# Altium PCB cs301_Group11_4_holes.PcbDoc
Units mm, origin at the board's own origin, x right, y up, seen from the top; angles counter-clockwise.
Board outline 87.88 x 127 mm, 2 copper layers (Top Layer, Bottom Layer); 87 components, 60 nets, 284 pads, 20 vias.
Unrouted connection lines stored in the file: 1.
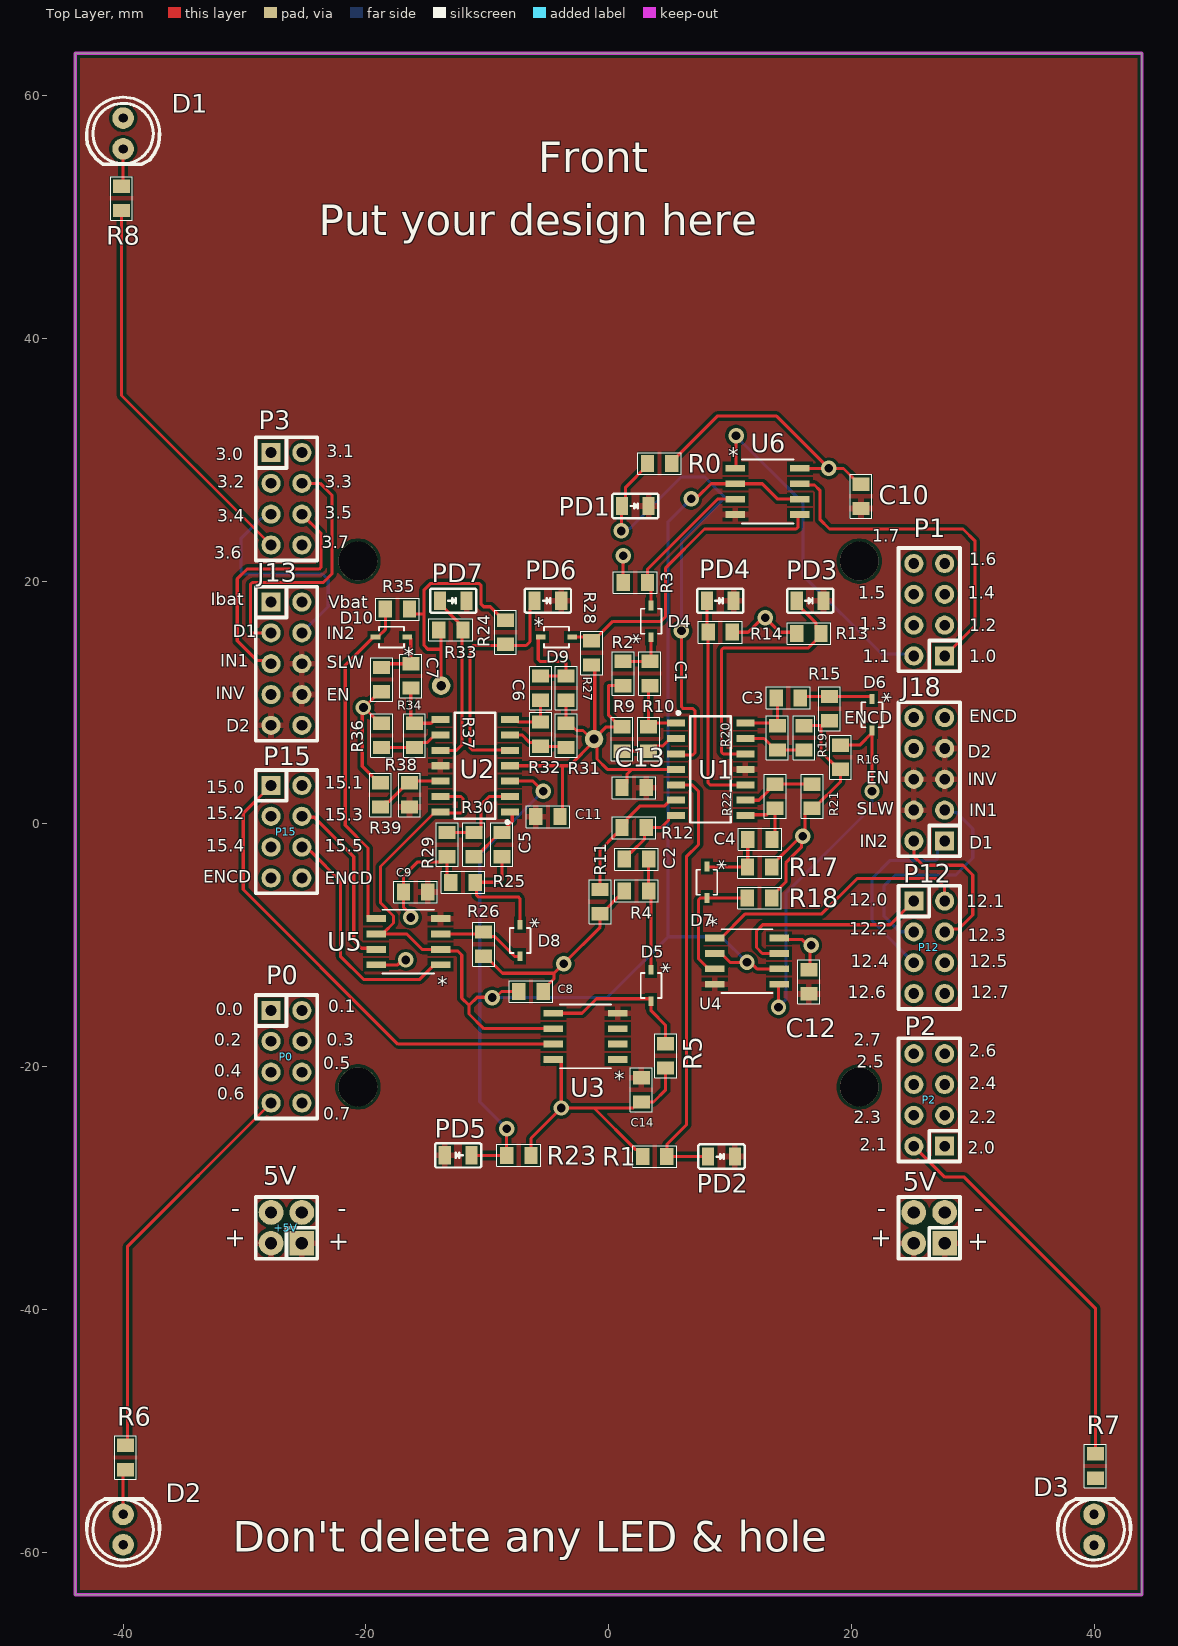
[diagram p0: Top Layer view]
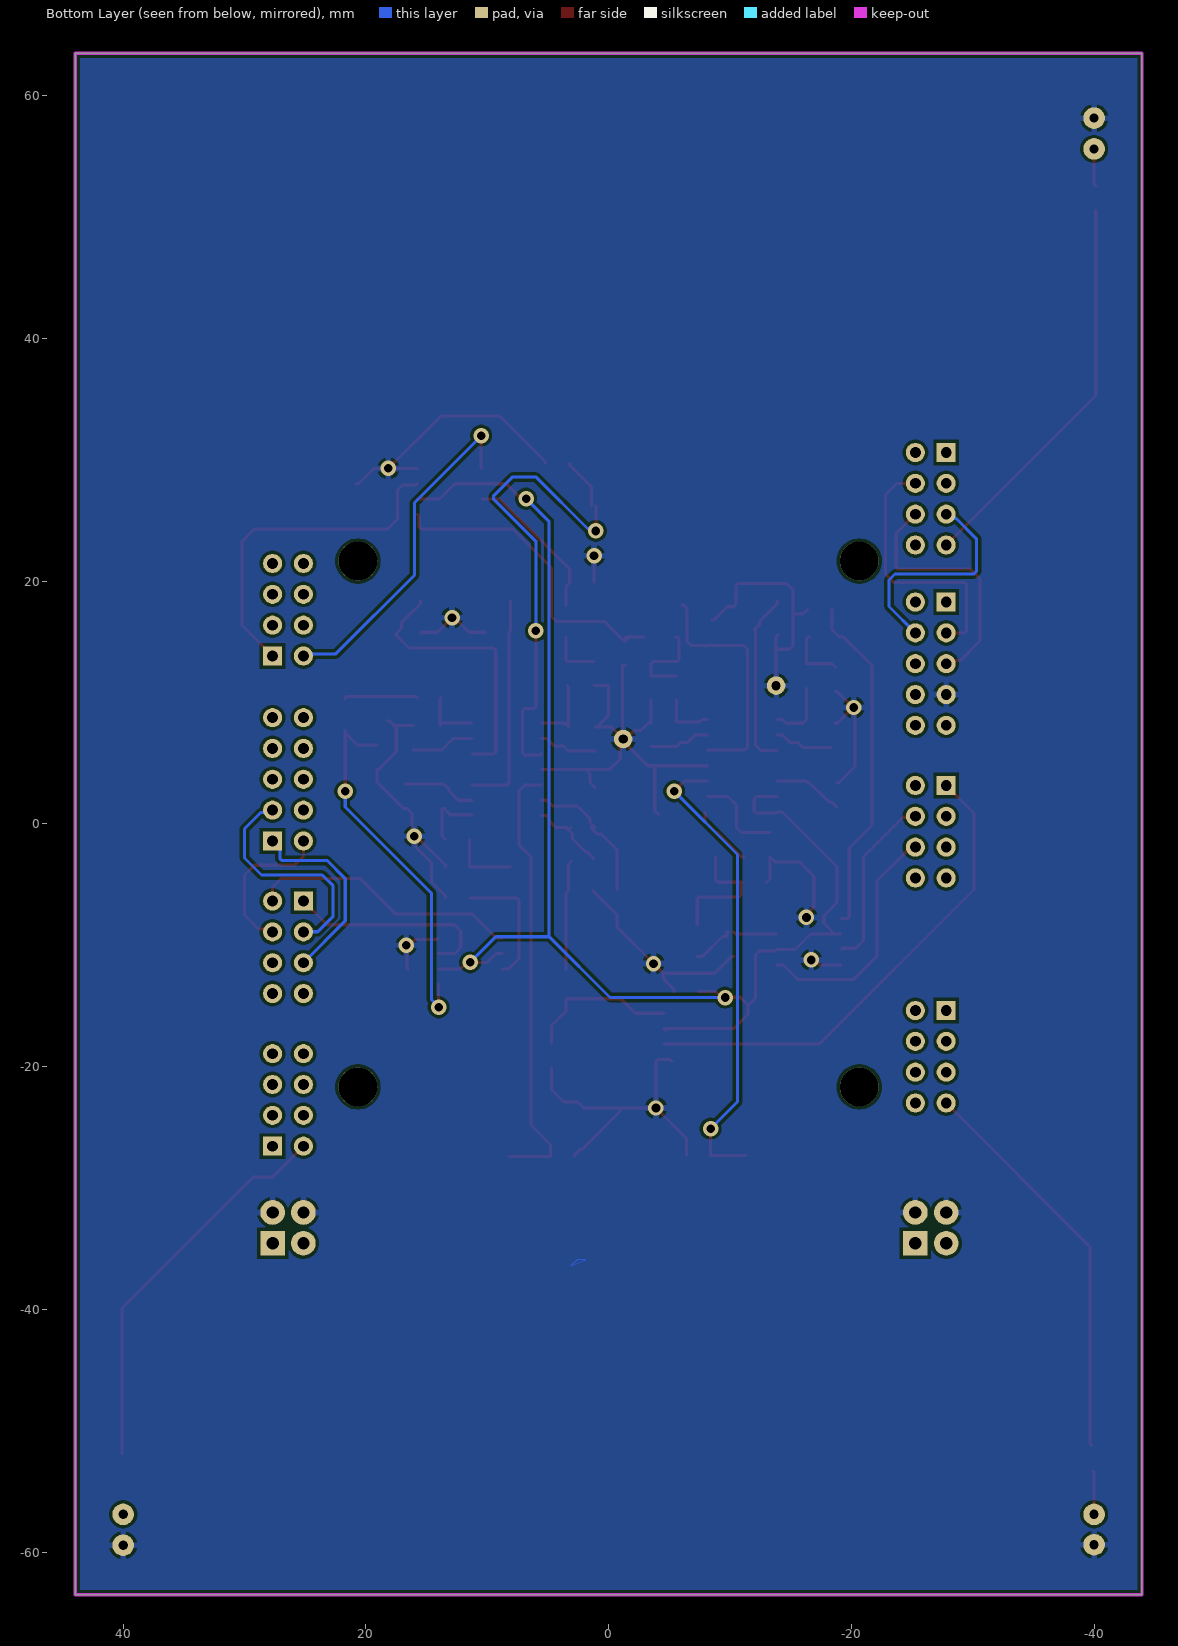
[diagram p1: Bottom Layer view, seen from below]

## Layer stack, top to bottom
Top Solder: solder mask 0.0102, Solder Resist, Dk 3.5
Top Layer: signal copper 0.0356
Dielectric1: dielectric 0.32, FR-4, Dk 4.8
Bottom Layer: signal copper 0.0356
Bottom Solder: solder mask 0.0102, Solder Resist, Dk 3.5

## Board outline
-43.942,-63.5 -43.942,63.5 43.942,63.5 43.942,-63.5

## Design rules (kind name [scope] priority, off if disabled: settings)
Clearance [All] p1: gap=0.254 ignorepadtopadclearanceinfootprint=FALSE except(0: Arc-Hole Track-Hole SMDPad-Hole THPad-Hole Via-Hole Fill-Hole Poly-Hole Region-Hole Text-Hole)
PolygonConnect [All] p1: connectstyle=Relief reliefconductorwidth=0.508 reliefentries=4 polygonreliefangle="90 Angle" airgapwidth=0.254
RoutingVias [All] p1: holewidth=0.711 width=1.27 viastyle="Through Hole" minholewidth=0.711 minwidth=1.27 maxholewidth=0.711 maxwidth=1.27
SilkToSolderMaskClearance SilkscreenOverComponentPads [IsPad] p1: minsilkscreentomaskgap=0.254 clearancetoexposedcopper=TRUE
SolderMaskExpansion [All] p1: expansion=0.102 istentingtop=FALSE
Width [All] p1: maxlimit=0.762 minlimit=0.254 preferedwidth=0.254 minimp=50.000000 maximp=50.000000 favimp=50.000000
29 further rules are at their usual default settings.

## Classes and differential pairs
component class Sensors: C1 C2 C3 C4 C5 C6 C7 D4 D5 D6 D7 D8 D9 D10 PD1 PD2 PD3 PD4 PD5 PD6 PD7 R0 R1 R2 R3 R4 R5 R9 R10 R11 R12 R13 R14 R15 R16 R17 R18 R19 R20 R21 R22 R23 R24 R25 R26 R27 R28 R29 R30 R31 R32 R33 R34 R35 R36 R37 U1 U2 U3 U4 U5 U6

## Components (designator, comment, footprint, x,y, rotation, side; value= is the part's Value field where it differs from the comment)
5V "5V" IDC4 27.686,-34.544 r90 top locked
+5V "5V" IDC4 -25.273,-34.544 r90 top locked
C1 "*" "0805 CAP" 3.4,12.4 r90 top
C2 "*" "0805 CAP" 2.3,-2.9 r0 top
C3 "*" "0805 CAP" 14.8,10.4 r0 top
C4 "*" "0805 CAP" 12.462,-1.27 r180 top
C5 "*" "0805 CAP" -8.8,-1.7 r270 top
C6 "*" "0805 CAP" -5.6,11.2 r90 top
C7 "*" "0805 CAP" -16.3,12.2 r90 top
C8 "*" "0805 CAP" -6.4,-13.8 r0 top
C9 "*" "0805 CAP" -15.9,-5.6 r0 top
C10 "*" "0805 CAP" 20.8,27 r90 top
C11 "*" "0805 CAP" -5,0.6 r0 top
C12 "*" "0805 CAP" 16.5,-13 r90 top
C13 "*" "0805 CAP" 2.1,3 r180 top
C14 "*" "0805 CAP" 2.7,-21.9 r270 top
D1 "LED" LED0.1/5MM#1 -40,55.62 r180 top locked
D2 "LED" LED0.1/5MM#2 -40,-56.88 r0 top locked
D3 "LED" LED0.1/5MM#1 40,-56.88 r0 top locked
D4 "BAT54JFILM" CR_SOD323_BAT54_STM 3.5,16.7 r90 top
D5 "BAT54JFILM" CR_SOD323_BAT54_STM 3.5,-13.3 r270 top
D6 "BAT54JFILM" CR_SOD323_BAT54_STM 21.7,8.998 r270 top
D7 "BAT54JFILM" CR_SOD323_BAT54_STM 8.1,-4.8 r270 top
D8 "BAT54JFILM" CR_SOD323_BAT54_STM -7.3,-9.6 r270 top
D9 "BAT54JFILM" CR_SOD323_BAT54_STM -4.3,15.4 r0 top
D10 "BAT54JFILM" CR_SOD323_BAT54_STM -17.9,15.4 r180 top
J13 "CON10" IDC10 -27.813,18.288 r270 top locked
J18 "CON10" IDC10 27.686,-1.397 r90 top locked
P0 "P0" idc8 -27.813,-15.367 r270 top locked
P1 "P1" idc8 27.686,13.843 r90 top locked
P2 "P2" idc8 27.686,-26.543 r90 top locked
P3 "P3" idc8 -27.813,30.607 r270 top locked
P12 "P12" idc8 25.146,-6.35 r270 top locked
P15 "P15" IDC8 -27.813,3.175 r270 top locked
PD1 "SD019" SD019 2.2,26.2 r0 top
PD2 "SD019" SD019 9.3,-27.4 r0 top
PD3 "SD019" SD019 16.6,18.4 r0 top
PD4 "SD019" SD019 9.2,18.4 r0 top
PD5 "SD019" SD019 -12.4,-27.3 r180 top
PD6 "SD019" SD019 -5,18.4 r0 top
PD7 "SD019" SD019 -12.8,18.4 r0 top
R0 "*" "0805 RES" 4.2,29.7 r180 top
R1 "*" "0805 RES" 3.8,-27.4 r0 top
R2 "*" "0805 RES" 1.2,12.4 r90 top
R3 "*" "0805 RES" 2.2,19.9 r0 top
R4 "*" "0805 RES" 2.3,-5.5 r0 top
R5 "*" "0805 RES" 4.7,-19.1 r90 top
R6 "*" "0805 RES" -39.8,-52.2 r270 top
R7 "*" "0805 RES" 40.1,-52.9 r90 top
R8 "*" "0805 RES" -40.132,51.546 r270 top
R9 "*" "0805 RES" 1.1,7 r90 top
R10 "*" "0805 RES" 3.3,7 r90 top
R11 "*" "0805 RES" -0.7,-6.4 r270 top
R12 "*" "0805 RES" 2.1,-0.3 r0 top
R13 "*" "0805 RES" 16.5,15.7 r0 top
R14 "*" "0805 RES" 9.2,15.8 r180 top
R15 "*" "0805 RES" 18.2,9.5 r90 top
R16 "*" "0805 RES" 19.1,5.5 r90 top
R17 "*" "0805 RES" 12.446,-3.556 r180 top
R18 "*" "0805 RES" 12.43,-6.096 r180 top
R19 "*" "0805 RES" 16.1,7.1 r90 top
R20 "*" "0805 RES" 13.9,7.1 r90 top
R21 "*" "0805 RES" 16.764,2.286 r270 top
R22 "*" "0805 RES" 13.716,2.286 r270 top
R23 "*" "0805 RES" -7.4,-27.3 r180 top
R24 "*" "0805 RES" -8.5,15.8 r270 top
R25 "*" "0805 RES" -12,-4.8 r0 top
R26 "*" "0805 RES" -10.3,-9.9 r90 top
R27 "*" "0805 RES" -3.5,11.2 r90 top
R28 "*" "0805 RES" -1.4,14.1 r90 top
R29 "*" "0805 RES" -13.3,-1.7 r270 top
R30 "*" "0805 RES" -11.1,-1.7 r270 top
R31 "*" "0805 RES" -3.5,7.3 r90 top
R32 "*" "0805 RES" -5.6,7.4 r90 top
R33 "*" "0805 RES" -13,16 r0 top
R34 "*" "0805 RES" -18.7,11.9 r90 top
R35 "*" "0805 RES" -17.4,17.7 r180 top
R36 "*" "0805 RES" -18.7,7.3 r90 top
R37 "*" "0805 RES" -16,7.3 r90 top
R38 "*" "0805 RES" -16.4,2.4 r270 top
R39 "*" "0805 RES" -18.8,2.4 r270 top
U1 "LM324DR2G" SOIC-14 8.4,4.5 r0 top
U2 "LM324DR2G" SOIC-14 -11,4.8 r180 top
U3 "LM393EDR2G" SOIC8_4X5_ONS -1.9,-17.5 r180 top
U4 "LM393EDR2G" SOIC8_4X5_ONS 11.4,-11.3 r0 top
U5 "LM393EDR2G" SOIC8_4X5_ONS -16.5,-9.7 r180 top
U6 "LM393EDR2G" SOIC8_4X5_ONS 13.1,27.4 r0 top

## Footprints (in the part's own frame and the unit in brackets; to place one, negate y for a bottom-side part, rotate by r counter-clockwise, add the part's x,y. Pads: shape width x height; smd on the part's side, far side on the other; paste and mask are expansions set on the pad)
"0805 CAP" [mm] "http://www.digikey.co.nz/Web%20Export/Supplier%20Content/Vishay_8026/PDF/VishayBeyschlag_SolderPad.pdf?redirected=1 with dimension G modified by +0.25mm"
  rect 1.1x1.4 smd: 1(-1,0) 2(1,0)
  silkscreen extent -1.8,-0.9 1.8,0.9, body extent -1.04,-0.66 1.04,0.66, height 0.61
"0805 RES" [mm] "http://www.digikey.co.nz/Web%20Export/Supplier%20Content/Vishay_8026/PDF/VishayBeyschlag_SolderPad.pdf?redirected=1 with dimension G modified by +0.25mm"
  rect 1.1x1.4 smd: 1(-1,0) 2(1,0)
  silkscreen extent -1.8,-0.9 1.8,0.9, body extent -1.04,-0.66 1.04,0.66, height 0.61
CR_SOD323_BAT54_STM [mil]
  rect 31.5x17 smd paste+0 mask+0: 1(-51.25,0) 2(51.25,0)
  silkscreen extent -40,-34 40,34, body extent -53,-29 53,29, height 46
IDC4 [mil]
  rect 80x80 hole 40: 1(0,0)
  round 80 hole 40: 2(0,100) 3(100,0) 4(100,100)
  silkscreen extent -50,-50 150,150
idc8 [mil]
  rect 62x62 hole 35: 1(0,0)
  round 62 hole 35: 2(0,100) 3(100,0) 4(100,100) 5(200,0) 6(200,100) 7(300,0) 8(300,100)
  silkscreen extent -50,-50 350,150
IDC8 [mil]
  rect 62x62 hole 35: 1(0,0)
  round 62 hole 35: 2(0,100) 3(100,0) 4(100,100) 5(200,0) 6(200,100) 7(300,0) 8(300,100)
  silkscreen extent -50,-50 350,150
IDC10 [mil]
  rect 62x62 hole 35: 1(0,0)
  round 62 hole 35: 2(0,100) 3(100,0) 4(100,100) 5(200,0) 6(200,100) 7(300,0) 8(300,100) 9(400,0) 10(400,100)
  silkscreen extent -50,-50 450,150
LED0.1/5MM#1 [mil]
  round 70 hole 30: A(0,0) K(0,-100)
  silkscreen extent -118,-168 118,50
LED0.1/5MM#2 [mil]
  round 70 hole 30: A(0,0) K(0,-98.43)
  silkscreen extent -118,-168 118,50
SD019 [mm]
  rect 1x1.5 smd: 1(-1.1,0) 2(1.1,0)
  silkscreen extent -1.9,-1 1.9,1, body extent -1,-0.63 1,0.63, height 1.1
SOIC8_4X5_ONS [mil]
  rect 63x22 smd paste+0 mask+0: 1(-104.5,75) 2(-104.5,25) 3(-104.5,-25) 4(-104.5,-75) 5(104.5,-75) 6(104.5,-25) 7(104.5,25) 8(104.5,75)
  silkscreen extent -84,-104 84,104, body extent -122,-99 122,99, height 69
SOIC-14 [mm] "SOIC, 14-Leads, Body 8.75x4mm, Pitch 1.27mm"
  rect 1.48x0.58 smd: 1(-2.86,3.81) 2(-2.86,2.54) 3(-2.86,1.27) 4(-2.86,0) 5(-2.86,-1.27) 6(-2.86,-2.54) 7(-2.86,-3.81) 8(2.86,-3.81) 9(2.86,-2.54) 10(2.86,-1.27) 11(2.86,0) 12(2.86,1.27) 13(2.86,2.54) 14(2.86,3.81)
  silkscreen extent -2.78,-4.38 1.67,4.77, body extent -3.1,-4.38 3.1,4.37, height 1.75

## Part data
5V +5V: library part CON4, "Connector"
C1 C2 C3 C4 C5 C6 C7 C8 C9 C10 C11 C12 C13 C14: library part CerCap_SMT_0805, "SMT ceramic capacitor 0805 size"
D4 D5 D6 D7 D8 D9 D10: "No Description Available", Mfr_Name=STMicroelectronics
J13 J18: "Connector"
P0 P1 P2 P3: library part CON8, "Connector"
P12 P15: library part CON8_1, "Connector"
R0 R1 R2 R3 R4 R5 R6 R7 R8 R9 R10 R11 R12 R13 R14 R15 R16 R17 R18 R19 R20 R21 R22 R23 R24 R25 R26 R27 R28 R29 R30 R31 R32 R33 R34 R35 R36 R37 R38 R39: library part Res_SMT_0805, "0805 resistor", ComponentLink1Description=https://nz.mouser.com/datasheet/2/315/AOA0000C304-1149620.pdf, LatestRevisionDate=17-Jul-2002, LatestRevisionNote="Re-released for DXP Platform.", PackageReference=AXIAL-0.4, Published=8-Jun-2000, Publisher="Altium Limited"
U1 U2: library part LM324DR_SMT_SOIC16, "Single Supply Quad Operational Amplifier, 3 to 32 V, 0 to 70 degC, 14-Pin SOIC, Pb-Free, Tape and Reel", Manufacturer="On Semiconductor", ComponentLink1Description="Manufacturer URL", ComponentLink1URL=http://www.onsemi.com/, ComponentLink2Description=Datasheet, ComponentLink2URL=http://www.onsemi.cn/pub_link/Collateral/LM324-D.PDF, ComponentLink3Description="Package Specification", ComponentLink3URL=http://www.onsemi.com/pub_link/Collateral/751A-03.PDF, DatasheetVersion="Rev. 25", Mounting Technology="Surface Mount", PackageDescription="14-Pin Small Outline Integrated Circuit, Body 8.65 x 3.9 mm, Pitch 1.27 mm", PackageReference=SOIC-14-751A-03, PackageVersion="Rev. K, 05/2011", Packing="Tape and Reel", PartNumber=LM324DR2G, RoHS=TRUE, VCC Max (V)=32, VCC Min (V)=3

## Free pads (board coordinates)
  round 3.2 hole 3.2 unplated: 1(-20.65,-21.666) 1(-20.65,21.666) 1(20.65,-21.666) 1(20.65,21.666)
  round 1.524 hole 0.762: 2(-1.2,7) 3(-13.8,11.4)

## Via types
v1: diameter 1.27, hole 0.711, Top Layer to Bottom Layer, 20 vias

## Nets (pads, with @x,y where several pads share a name; then routed paths per layer and width w, separated by ;. In a path a pad name is that pad's centre, name@x,y a point inside that pad or via, vN(x,y) a via of type N, cw(c..) or ccw(c..) an arc to the next point about the centre after c; other vN are vias at no path point)
1.0: P1.1 U6.7 | length 28.3
  Top Layer w0.254: U6.7 15.854,27.935 16.965,27.935 17.4,27.5 17.4,25.1 18.2,24.3 29.2,24.3 30.195,23.305 30.195,16.352 P1.1
1.1: P1.2 U6.1 | length 28.4
  Top Layer w0.254: U6.1 10.5,29.359 v1(10.5,32)
  Bottom Layer w0.254: v1@10.446,32.011 16,26.457 16,20.5 22.479,14.021 24.968,14.021 P1.2
12.0: P12.1 U4.7 | length 17.4
  Top Layer w0.254: U4.7 12.665,-10.665 12.18,-10.18 12.18,-8.82 12.7,-8.3 23.196,-8.3 P12.1
12.1: P12.2 U4.1 | length 22.4
  Top Layer w0.254: U4.1 9.266,-9.395 11.261,-7.4 17.567,-7.4 20.467,-4.5 27,-4.5 27.686,-5.186 P12.2
15.0: P15.1 U3.7 | length 40.3
  Top Layer w0.254: P15.1 -30.1,0.888 -30.1,-5.4 -17.365,-18.135 U3.7
15.3: P15.4 U5.7 | length 14.7
  Top Layer w0.254: P15.4 -25.191,0.553 -24.253,0.553 -21,-2.7 -21,-9.6 -20.365,-10.235 -19.254,-10.235 U5.7
15.5: P15.6 U5.1 | length 20.1
  Top Layer w0.254: P15.6 -24.916,-1.905 -24.532,-2.288 -24.512,-2.288 -22.1,-4.7 -22.1,-10.9 -20.2,-12.8 -15.561,-12.8 -14.366,-11.605 U5.1
+5V: 5V.1 5V.2 +5V.1 +5V.2 C9.2 C10.1 C11.1 C12.1 C13.1 C14.1 J13.6 J13.8 J13.9 J18.4 J18.5 J18.6 J18.7 PD1.2 PD2.2 PD3.2 PD4.2 PD5.2 PD6.2 PD7.2 R38.2 U1.11 U2.11 U3.4 U4.4 U5.4 U6.4
GND: 5V.3 5V.4 +5V.3 +5V.4 C8.2 C9.1 C10.2 C11.2 C12.2 C13.2 C14.2 D1.K D2.K D3.K J13.7 pad.2 pad.3 R0.1 R1.1 R2.1 R3.1 R4.1 R5.1 R9.2 R11.2 R13.1 R14.1 R15.1 R16.1 R17.1 R18.1 R19.2 R21.2 R23.1 R24.1 R25.1 R26.1 R27.1 R28.1 R29.2 R31.2 R33.1 R34.1 R35.1 R36.2 R39.1 U1.4 U2.4 U3.8 U4.8 U5.8 U6.8 | length 190.4
  Top Layer w0.254: U5.8 -17.38,-11.605 -16.975,-11.2 v1(-16.7,-11.2) ; R39.1 -18.95,3.4 -20.3,4.75 -20.3,9.5 v1(-20.2,9.6) v1@-20.15,9.6 ; R36.2 -18.85,8.3 v1@-20.15,9.6 ; R34.1 -18.85,10.9 v1@-20.15,9.6 ; R35.1 -16,17.3 -15.2,17.3 ; v1(-16.3,-7.7) -16.3,-7.463 -16.9,-6.863 C9.1 -16.9,-4.3 -15.723,-3.123 -13.723,-3.123 R29.2 -13.3,-4.5 R25.1 ; R33.1@-14,15.6 -13.973,15.6 -13.8,15.427 -13.8,14.251 ; pad.3 -13.8,14.251 ; R26.1 -10.15,-10.9 -8.75,-12.3 -4.5,-12.3 ; R24.1 -8.65,16.8 -9.75,17.9 -10.3,17.9 -10.5,18.1 -10.5,19.651 -10.649,19.8 -14.7,19.8 -15.2,19.3 -15.2,17.3 ; U2.4 -3.8,4.8 ; R23.1 -6.4,-25.9 v1(-3.9,-23.4) ; C8.2 -5.4,-13.65 -4.504,-12.754 -4.504,-12.304 -4.5,-12.3 ; U3.8@-5.227,-19.557 -5.075,-19.405 U3.8 -4.052,-19.405 -3.9,-19.557 v1(-3.9,-23.4) ; C11.2@-4.092,0.8 -3.8,1.092 -3.8,4.8 ; R31.2 R27.1 ; R31.2@-3.35,8.4 -2.65,7.7 -2.116,7.7 -1.416,7 pad.2 ; R28.1 -1.1,13.1 -1.142,13.058 pad.2@-1.142,7.058 ; R11.2 -0.7,-8.5 ; C13.2 1.523,3.423 1.523,4.123 1.9,4.5 ; R9.2 R9.2@0.95,8 ; R2.1 0,11.4 0,8.95 R9.2@0.95,8 ; R3.1 v1(1.2,22.1) ; R4.1 -0.7,-7.5 -0.7,-8.5 ; R1.1 2.8,-27.25 2.377,-26.827 2.227,-26.827 -1.2,-23.4 ; R5.1 4.7,-21.9 3.7,-22.9 2.55,-22.9 2.05,-23.4 -1.2,-23.4 ; R0.1 5.2,29.85 8.95,33.6 13.842,33.6 v1@18.142,29.301 ; U1.4 1.9,4.5 ; R14.1 11.5,15.8 12.7,17 v1(12.9,17) 14.1,15.8 15.4,15.8 R13.1 ; R18.1 13.43,-5.946 14.6,-4.776 14.6,-3.2 15.883,-1.917 15.883,-1.117 v1(16,-1) ; R17.1 13.446,-3.406 15.852,-1 v1(16,-1) ; U4.8 14.159,-9.5 15.912,-9.5 16.407,-9.994 v1(16.682,-9.994) ; U6.8 15.759,29.301 v1@18.142,29.301 ; R19.2 R15.1@17.65,8.1 ; C12.2 16.6,-11.9 v1@16.6,-9.994 ; R15.1 18.05,8.5 R15.1@17.65,8.1 ; C10.2 20.65,28 19.354,29.296 v1(18.146,29.296) v1@18.142,29.301 ; -15.2,17.3 -15.2,14.7 -14.9,14.4 -13.949,14.4 -13.8,14.251 ; -4.5,-12.3 v1(-3.7,-11.5) -0.7,-8.5 ; v1(-3.9,-23.4) -1.2,-23.4 ; -3.8,4.8 -3.211,4.8 -1.2,6.811 pad.2 ; pad.2 pad.2@-1.142,7.058 ; pad.2 -0.957,6.757 -0.957,5.357 -0.1,4.5 1.9,4.5 ; pad.2@-1.142,7.058 -0.2,8 R9.2@0.95,8 ; v1(16,-1) 16.191,-0.809 16.191,0.863 16.614,1.286 R21.2 16.914,1.286 19.1,3.472 R16.1 18.95,4.5 17.5,5.95 17.5,7.95 R15.1@17.65,8.1
M1_D1: J13.3 P3.4 | length 22
  Top Layer w0.254: J13.3 -29.351,15.748 -29.5,15.897 -29.5,19.751 -29.351,19.9 -23.5,19.9 -22.8,20.6 -22.8,27.1 -23.767,28.067 P3.4
M1_IN1: J13.5 P3.6 | length 21
  Top Layer w0.254: J13.5 -28.066,13.461 -28.961,13.461 -30.6,15.1 -30.6,20.2 -29.8,21 -23.849,21 -23.7,21.149 -23.7,23.954 P3.6
M1_IN2: J13.4 P3.5 | length 18.8
  Bottom Layer w0.254: P3.5 -28.17,25.527 -28.513,25.185 -28.615,25.185 -30.3,23.5 -30.3,20.8 -30.1,20.6 -23.6,20.6 -23.1,20.1 -23.1,17.921 J13.4
M2_D1: J18.1 P12.5 | length 16.1
  Bottom Layer w0.254: P12.5 21.7,-7.984 21.7,-4.5 23.2,-3 26.94,-3 27.088,-2.851 27.088,-1.995 J18.1
M2_IN1: J18.3 P12.3 | length 19.1
  Bottom Layer w0.254: P12.3 25.134,-8.878 23.978,-8.878 22.7,-7.6 22.7,-5.1 23.6,-4.2 28.6,-4.2 30,-2.8 30,-0.4 28.644,0.956 27.873,0.956 J18.3
M2_IN2: J18.2 P12.4 | length 12.9
  Top Layer w0.254: J18.2 25.146,-2.646 25.9,-3.4 29.2,-3.4 30,-4.2 30,-7.5 28.854,-8.646 27.93,-8.646 P12.4
NetBT1_3: P2.3
NetBT1_4: P2.4
NetC1_1: C1.1 R10.2 U1.1 | length 5.8
  Top Layer w0.254: C1.1 3.3,11.3 R10.2 3.61,8.31 U1.1
NetC1_2: C1.2 D4.1 R2.2 | length 4.2
  Top Layer w0.254: R2.2 C1.2 3.5,13.5 D4.1
NetC2_1: C2.1 R12.2 U1.7 | length 6.4
  Top Layer w0.254: C2.1 1.3,-2.75 1.723,-2.327 1.873,-2.327 2.968,-1.232 2.968,-0.832 3.3,-0.5 R12.2 ; R12.2@3.4,-0.45 3.4,-0.3 4.331,-0.3 4.927,0.296 4.927,0.527 5.09,0.69 U1.7
NetC2_2: C2.2 D5.1 R4.2 | length 9.1
  Top Layer w0.254: C2.2@3.1,-3.1 3.3,-3.3 R4.2 3.5,-5.7 D5.1
NetC3_1: C3.1 R20.2 U1.14 | length 5.1
  Top Layer w0.254: U1.14 13.69,8.31 R20.2 13.9,10.3 C3.1
NetC3_2: C3.2 D6.1 R15.2 | length 6.1
  Top Layer w0.254: C3.2 15.9,10.5 R15.2 21.611,10.5 21.7,10.411 D6.1
NetC4_1: C4.1 R22.2 U1.8 | length 5.4
  Top Layer w0.254: U1.8@11.242,0.762 13.042,0.762 13.566,1.286 R22.2 13.716,-1.016 C4.1
NetC4_2: C4.2 D7.1 R17.2 | length 5.7
  Top Layer w0.254: D7.1 8.158,-3.556 R17.2 11.462,-3.54 C4.2
NetC5_1: C5.1 R30.2 U2.1 | length 5.1
  Top Layer w0.254: R30.2 -10.95,-2.7 -8.95,-0.7 -8.85,-0.7 -7.94,0.21 U2.1@-7.94,0.99
NetC5_2: C5.2 D8.1 R25.2 | length 11.1
  Top Layer w0.254: C5.2 -8.8,-4.6 -9,-4.8 R25.2 -10.9,-4.9 -10.9,-5.851 -10.751,-6 -7.449,-6 -7.3,-6.149 D8.1
NetC6_1: C6.1 R32.2 U2.7 | length 4.4
  Top Layer w0.254: U2.7 -7.69,8.61 -7.48,8.4 R32.2 C6.1
NetC6_2: C6.2 D9.1 R27.2 | length 7.7
  Top Layer w0.254: C6.2 R27.2 -3.5,13.251 -3.649,13.4 -5.651,13.4 -5.8,13.549 -5.8,15.311 -5.711,15.4 D9.1@-5.502,15.4
NetC7_1: C7.1 R37.2 U2.8 | length 5.3
  Top Layer w0.254: C7.1 -16.3,8.6 R37.2 -14.62,8.3 -14.31,8.61 U2.8
NetC7_2: C7.2 D10.1 R34.2 | length 5
  Top Layer w0.254: R34.2 -18.4,13.2 C7.2 -16.3,15.286 -16.414,15.4 D10.1
NetD1_A: D1.A R8.1 | length 3.1
  Top Layer w0.254: R8.1 -40,52.678 D1.A
NetD2_A: D2.A R6.2 | length 3.6
  Top Layer w0.254: D2.A -40,-53.4 R6.2@-39.9,-53.3
NetD3_A: D3.A R7.1
NetD4_2: D4.2 R3.2 U6.3 | length 12.8
  Top Layer w0.254: D4.2 3.5,19.6 R3.2 3.2,21 8.965,26.765 U6.3
NetD5_2: D5.2 R5.2 U3.5 | length 12.7
  Top Layer w0.254: U3.5 -2.195,-15.595 -1,-14.4 3.411,-14.4 3.5,-14.489 D5.2 3.5,-15.4 4.7,-16.6 R5.2
NetD6_2: D6.2 R16.2 U4.5 | length 30.9
  Top Layer w0.254: v1(14,-15.1) 14,-13.259 U4.5 ; R16.2 20.688,6.5 D6.2@21.7,7.512 ; v1(21.7,2.7) D6.2@21.7,7.512 ; D6.2 D6.2@21.7,7.512
  Bottom Layer w0.254: v1(14,-15.1) 14,-15.074 14.6,-14.474 14.6,-5.7 21.7,1.4 v1(21.7,2.7)
NetD7_2: D7.2 R18.2 U4.3 | length 10.6
  Top Layer w0.254: U4.3 8.225,-11.935 7.4,-11.11 7.4,-6.251 7.549,-6.102 11.424,-6.102 R18.2
NetD8_2: D8.2 R26.2 U5.3 | length 7.2
  Top Layer w0.254: U5.3 -10.465,-9.065 R26.2 ; R26.2@-9.882,-8.918 -9.732,-8.918 -9.732,-9.26 -9.727,-9.265 -9.385,-9.265 -7.748,-10.902 D8.2
NetD9_2: D9.2 R28.2 U6.5 | length 26.7
  Top Layer w0.254: D9.2@-2.898,15.4 R28.2@-1.7,15.4 ; R28.2@-1.788,15.488 R28.2@-1.7,15.4 ; U6.5 15.752,25.495 15.6,25.343 15.6,24.449 15.451,24.3 7.9,24.3 4.7,21.1 4.7,17.1 4.3,16.7 0.35,16.7 -1.25,15.1 R28.2 ; R28.2@-1.7,15.4 -1.4,15.4 R28.2 ; R28.2@-1.7,15.4 R28.2
NetD10_2: D10.2 R35.2 U5.5 | length 28.4
  Top Layer w0.254: U5.5 -19.675,-7.795 -19.827,-7.643 -19.827,-1.973 -21.7,-0.1 -21.7,13.086 -19.386,15.4 -19.018,15.4 -18.929,15.489 -18.4,16.018 R35.2
NetP0_7: P0.7 R6.1 | length 33.2
  Top Layer w0.254: R6.1 -39.65,-51.05 -39.65,-34.824 P0.7
NetP2_2: P2.2 R7.2 | length 32.5
  Top Layer w0.254: P2.2 27.703,-29.1 29.3,-29.1 40.1,-39.9 R7.2
NetP3_7: P3.7 R8.2 | length 32.7
  Top Layer w0.254: R8.2 -40.132,35.306 P3.7
NetPD1_1: PD1.1 R0.2 U1.3 | length 43
  Top Layer w0.254: v1(1.054,24.146) 1.054,26.154 PD1.1 ; PD1.1@1.4,26.2 1.4,27.75 3.2,29.55 R0.2 ; U1.3 5.61,5.7 6.951,5.7 7.1,5.849 7.1,9.351 6.951,9.5 6.149,9.5 6,9.649 v1(6,15.909)
  Bottom Layer w0.254: v1@0.6,24.1 1.5,24.1 1.5,24.317 1.523,24.34 1.74,24.34 6,28.6 7.9,28.6 9.495,27.005 9.495,26.795 6,23.3 v1(6,15.909)
NetPD2_1: PD2.1 R1.2 U1.5 | length 36.7
  Top Layer w0.254: U1.5 6.87,3.23 7.4,2.7 7.4,-1.7 6.4,-2.7 6.4,-24.8 4.8,-26.4 R1.2 PD2.1
NetPD3_1: PD3.1 R13.2 U1.12 | length 22.8
  Top Layer w0.254: U1.12 9.449,5.77 9.3,5.919 9.3,14.351 9.449,14.5 16.45,14.5 17.5,15.55 R13.2 17.077,16.123 17.077,16.573 15.5,18.15 PD3.1
NetPD4_1: PD4.1 R14.2 U1.10 | length 18.2
  Top Layer w0.254: PD4.1 8.1,15.9 R14.2 8.2,3.379 8.349,3.23 U1.10
NetPD5_1: PD5.1 R23.2 U2.3 | length 39.1
  Top Layer w0.254: PD5.1 R23.2 v1(-8.4,-25.1) ; U2.3 -6.23,3.53 v1(-5.4,2.7)
  Bottom Layer w0.254: v1(-8.4,-25.1) -10.616,-22.884 -10.616,-2.516 v1(-5.4,2.7)
NetPD6_1: PD6.1 R24.2 U2.5 | length 20.2
  Top Layer w0.254: U2.5 -8.17,6.1 -11.251,6.1 -11.426,6.275 -11.426,14.425 -11.151,14.7 -8.6,14.7 R24.2 -8.4,14.7 -6.8,14.7 -6.473,15.027 -6.473,17.727 -6.1,18.1 PD6.1@-6,18
NetPD7_1: PD7.1 R33.2 U2.10 | length 14.7
  Top Layer w0.254: PD7.1 -13.9,18.15 -12.423,16.673 -12.423,16.423 R33.2 -12.092,15.908 -12.092,6.508 -12.53,6.07 U2.10
NetR9_1: R9.1 R10.1 U1.2 | length 4.9
  Top Layer w0.254: R9.1 R10.1 3.723,6.423 4.473,6.423 5.09,7.04 U1.2
NetR11_1: R11.1 R12.1 U1.6 | length 11.9
  Top Layer w0.254: R11.1 -0.7,-2.149 0.634,-0.815 0.977,-0.815 1.4,-0.392 R12.1@1.4,-0.15 ; R12.1 1.523,0.123 1.523,0.423 2.6,1.5 4.63,1.5 5.09,1.96 U1.6
NetR19_1: R19.1 R20.1 U1.13 | length 5.2
  Top Layer w0.254: U1.13 12.81,7.04 13.75,6.1 R20.1 16.068,6.1 16.084,6.116 R19.1
NetR21_1: R21.1 R22.1 U1.9 | length 6.1
  Top Layer w0.254: U1.9 12.381,1.96 13.143,2.722 13.143,2.863 13.566,3.286 R22.1 R21.1
NetR29_1: R29.1 R30.1 U2.2 | length 7.5
  Top Layer w0.254: R29.1 R30.1 -10.95,-0.7 -10.527,-0.277 -10.527,1.573 -9.84,2.26 U2.2
NetR31_1: R31.1 R32.1 U2.6 | length 5
  Top Layer w0.254: U2.6 -7.141,7.34 -6.532,6.732 -5.932,6.732 R32.1 R31.1@-3.5,6.4
NetR36_1: R36.1 R37.1 U2.9 | length 4.9
  Top Layer w0.254: R36.1@-18.3,6.3 R37.1 -15.577,6.723 -14.927,6.723 -14.31,7.34 U2.9
NetR38_1: R38.1 R39.2 U2.12 | length 5.8
  Top Layer w0.254: R39.2 -18.377,1.823 -18.127,1.823 -16.55,3.4 R38.1 -16.27,3.53 U2.12
Vref: C8.1 U2.13 U2.14 U3.6 U4.2 U4.6 U5.2 U5.6 U6.2 U6.6 | length 119.9
  Top Layer w0.254: U5.6 U5.6@-18.634,-9.065 ; U2.13 -12.16,2.26 -12,2.1 -12,1.049 -12.149,0.9 -13.77,0.9 U2.14 -14.31,0.99 -18.8,-3.5 -18.8,-6.5 -17.724,-7.576 -17.724,-8.155 -18.481,-8.913 U5.6@-18.634,-9.065 ; C8.1 -8.825,-13.8 -9.325,-14.3 v1(-9.6,-14.3) -9.623,-14.277 -10.833,-14.277 -11.5,-14.944 ; U3.6@-4.707,-17.017 U3.6 -10.283,-16.865 -11.5,-15.648 -11.5,-14.944 ; v1(6.8,26.8) 6.994,26.994 7.394,26.994 8.435,28.035 U6.2 12.665,28.035 13.935,26.765 U6.6 ; U4.2 9.266,-10.665 10.001,-11.4 v1(11.4,-11.4) 11.675,-11.4 12.21,-11.935 U4.6 ; U5.6@-18.634,-9.065 -16.635,-9.065 -15.365,-10.335 U5.2 -13.731,-10.45 -12.45,-10.45 -12.1,-10.8 -12.1,-14.344 -11.5,-14.944
  Bottom Layer w0.254: v1(-9.6,-14.3) -0.113,-14.3 4.9,-9.287 ; v1(6.8,26.8) 4.9,24.9 4.9,-9.287 ; v1(11.4,-11.4) 9.287,-9.287 4.9,-9.287
pads on no net: J13.1 J13.2 J13.10 J18.8 J18.9 J18.10 P0.1 P0.2 P0.3 P0.4 P0.5 P0.6 P0.8 P1.3 P1.4 P1.5 P1.6 P1.7 P1.8 P2.1 P2.5 P2.6 P2.7 P2.8 P3.1 P3.2 P3.3 P3.8 P12.6 P12.7 P12.8 P15.2 P15.3 P15.5 P15.7 P15.8 U3.1 U3.2 U3.3

## Polygon pours and split planes (outlines as drawn)
GND on Bottom Layer "GND_L02_P003" (solid, pour order 3): -43.942,-63.5 -43.942,63.5 43.942,63.5 43.942,-63.5
no net on Bottom Layer "NONET_L02_P002" (solid, pour order 2): 1.9,-35.9 2.6,-35.9 3.1,-36.4
+5V on Top Layer "+5V_L01_P005" (solid, pour order 5): -43.942,63.5 -43.942,-63.5 43.648,-63.206 43.648,63.2

## Keep-outs
Keep-Out Layer:
  the board outline again, w0.254

## Silkscreen, mask and mechanical layers (free items; w line width, h text height)
Top Overlay:
  text "Front" at -5.794,53.678 h2.54
  text "Put your design here" at -23.876,48.514 h2.54
  text "3.1" at -23.241,30.226 h1.02
  text "3.0" at -32.385,29.972 h1.02
  text "3.2" at -32.258,27.686 h1.02
  text "3.3" at -23.368,27.686 h1.02
  text "3.5" at -23.368,25.146 h1.02
  text "3.4" at -32.258,24.892 h1.02
  text "1.7" at 21.717,23.241 h1.02
  text "3.7" at -23.622,22.733 h1.02
  text "3.6" at -32.512,21.844 h1.02
  text "1.6" at 29.718,21.336 h1.02
  text "1.5" at 20.574,18.542 h1.02
  text "1.4" at 29.591,18.542 h1.02
  text "Ibat" at -32.766,18.034 h1.02
  text "Vbat" at -23.114,17.78 h1.02
  text "1.3" at 20.701,16.002 h1.02
  text "1.2" at 29.718,15.875 h1.02
  text "D1" at -30.988,15.367 h1.02
  text "IN2" at -23.241,15.24 h1.02
  text "1.1" at 20.955,13.335 h1.02
  text "1.0" at 29.718,13.335 h1.02
  text "IN1" at -32.004,12.954 h1.02
  text "SLW" at -23.241,12.827 h1.02
  text "INV" at -32.385,10.287 h1.02
  text "EN" at -23.241,10.16 h1.02
  text "ENCD" at 29.718,8.382 h1.02
  text "ENCD" at 19.431,8.255 h1.02
  text "D2" at -31.496,7.62 h1.02
  text "D2" at 29.591,5.461 h1.02
  text "EN" at 21.209,3.302 h1.02
  text "INV" at 29.591,3.175 h1.02
  text "15.1" at -23.368,2.921 h1.02
  text "15.0" at -33.147,2.54 h1.02
  text "SLW" at 20.447,0.762 h1.02
  text "IN1" at 29.718,0.635 h1.02
  text "15.2" at -33.147,0.381 h1.02
  text "15.3" at -23.368,0.254 h1.02
  text "IN2" at 20.701,-1.905 h1.02
  text "D1" at 29.718,-2.032 h1.02
  text "15.4" at -33.147,-2.286 h1.02
  text "15.5" at -23.368,-2.286 h1.02
  text "ENCD" at -33.401,-4.826 h1.02
  text "ENCD" at -23.368,-4.953 h1.02
  text "12.0" at 19.812,-6.731 h1.02
  text "12.1" at 29.464,-6.858 h1.02
  text "12.2" at 19.812,-9.144 h1.02
  text "12.3" at 29.591,-9.652 h1.02
  text "12.4" at 19.939,-11.811 h1.02
  text "12.5" at 29.718,-11.811 h1.02
  text "12.6" at 19.685,-14.351 h1.02
  text "12.7" at 29.845,-14.351 h1.02
  text "0.1" at -23.114,-15.494 h1.02
  text "0.0" at -32.385,-15.748 h1.02
  text "0.2" at -32.512,-18.288 h1.02
  text "0.3" at -23.241,-18.288 h1.02
  text "2.7" at 20.193,-18.288 h1.02
  text "2.6" at 29.718,-19.177 h1.02
  text "2.5" at 20.447,-20.066 h1.02
  text "0.5" at -23.495,-20.193 h1.02
  text "0.4" at -32.512,-20.828 h1.02
  text "2.4" at 29.718,-21.844 h1.02
  text "0.6" at -32.258,-22.733 h1.02
  text "0.7" at -23.495,-24.384 h1.02
  text "2.3" at 20.193,-24.638 h1.02
  text "2.2" at 29.718,-24.638 h1.02
  text "2.1" at 20.701,-26.924 h1.02
  text "2.0" at 29.591,-27.178 h1.02
  text "-" at -30.353,-31.242 h1.52 r180
  text "-" at -21.59,-31.242 h1.52 r180
  text "-" at 22.86,-31.242 h1.52 r180
  text "-" at 30.861,-31.242 h1.52 r180
  text "+" at -30.099,-35.052 h1.52 r90
  text "+" at 23.114,-35.052 h1.52 r90
  text "+" at -21.59,-35.306 h1.52 r90
  text "+" at 31.115,-35.306 h1.52 r90
  text "Don't delete any LED & hole" at -30.988,-59.944 h2.54

## Text inside footprints (layer, text, board x,y; h text height)
D4: Top Overlay "*" at 3.195,14.827 h1.27 r90; Mechanical 13 "*" at 4.122,15.862 h1.27 r90
D5: Top Overlay "*" at 3.805,-11.427 h1.27 r270; Mechanical 13 "*" at 2.878,-12.462 h1.27 r270
D6: Top Overlay "*" at 22.005,10.871 h1.27 r270; Mechanical 13 "*" at 21.078,9.836 h1.27 r270
D7: Top Overlay "*" at 8.405,-2.927 h1.27 r270; Mechanical 13 "*" at 7.478,-3.962 h1.27 r270
D8: Top Overlay "*" at -6.995,-7.727 h1.27 r270; Mechanical 13 "*" at -7.922,-8.762 h1.27 r270
D9: Top Overlay "*" at -6.173,15.705 h1.27; Mechanical 13 "*" at -5.138,14.778 h1.27
D10: Top Overlay "*" at -16.027,15.095 h1.27 r180; Mechanical 13 "*" at -17.062,16.022 h1.27 r180
U3: Top Overlay "*" at 1.326,-19.837 h1.27 r180; Mechanical 13 "*" at 0.03,-18.656 h1.27 r180
U4: Top Overlay "*" at 8.174,-8.963 h1.27; Mechanical 13 "*" at 9.47,-10.144 h1.27
U5: Top Overlay "*" at -13.274,-12.037 h1.27 r180; Mechanical 13 "*" at -14.57,-10.856 h1.27 r180
U6: Top Overlay "*" at 9.874,29.737 h1.27; Mechanical 13 "*" at 11.17,28.556 h1.27